# Altium PCB PCB1.PcbDoc
Units mm, origin at the board's own origin, x right, y up, seen from the top; angles counter-clockwise.
Board outline 55.21 x 23.62 mm, 2 copper layers (Top Layer, Bottom Layer); 41 components, 38 nets, 154 pads, 55 vias.
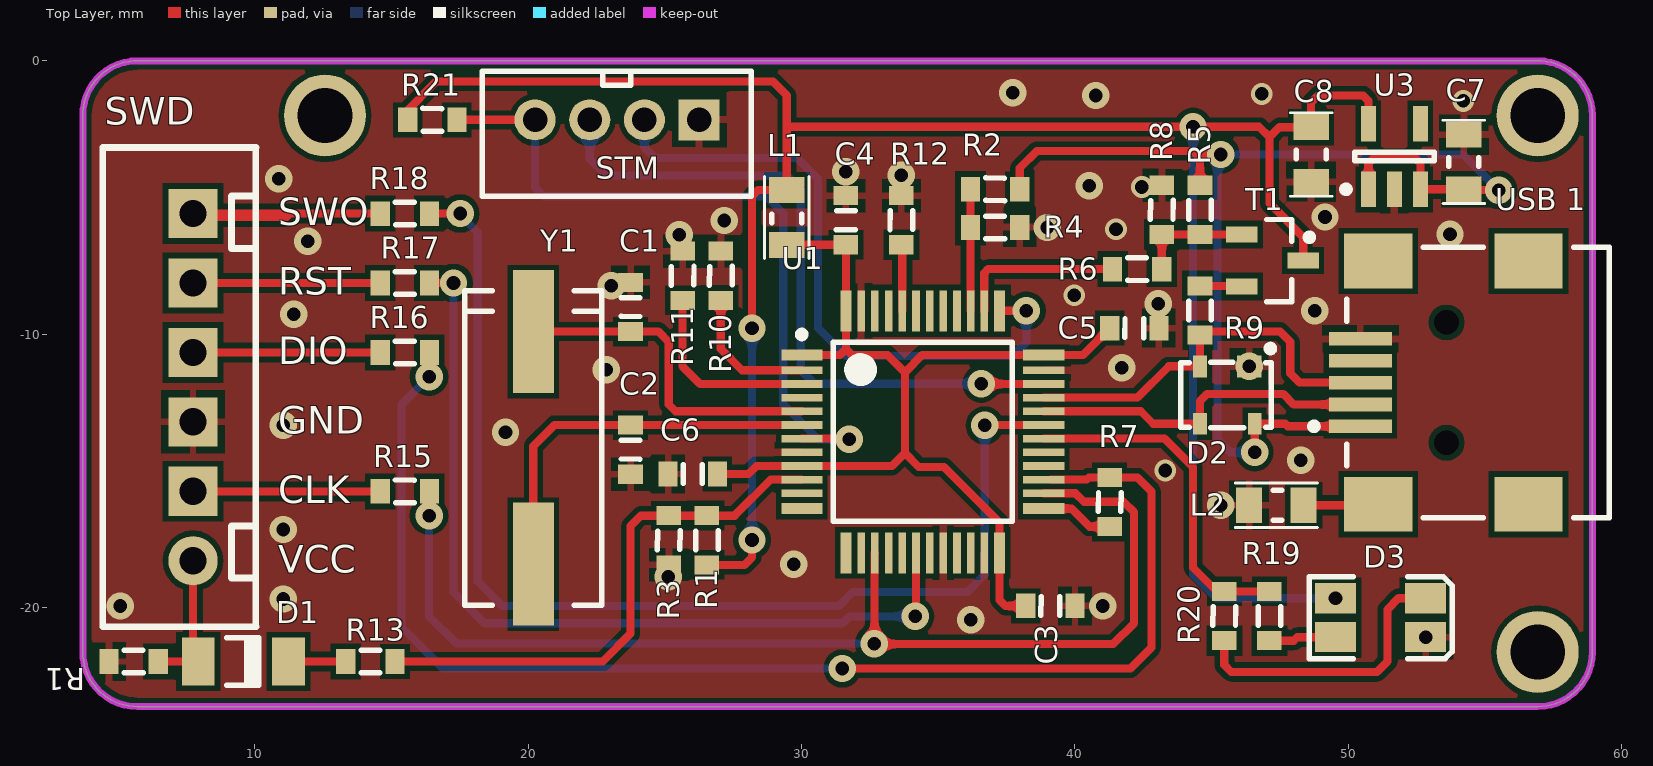
[diagram p0: Top Layer view]
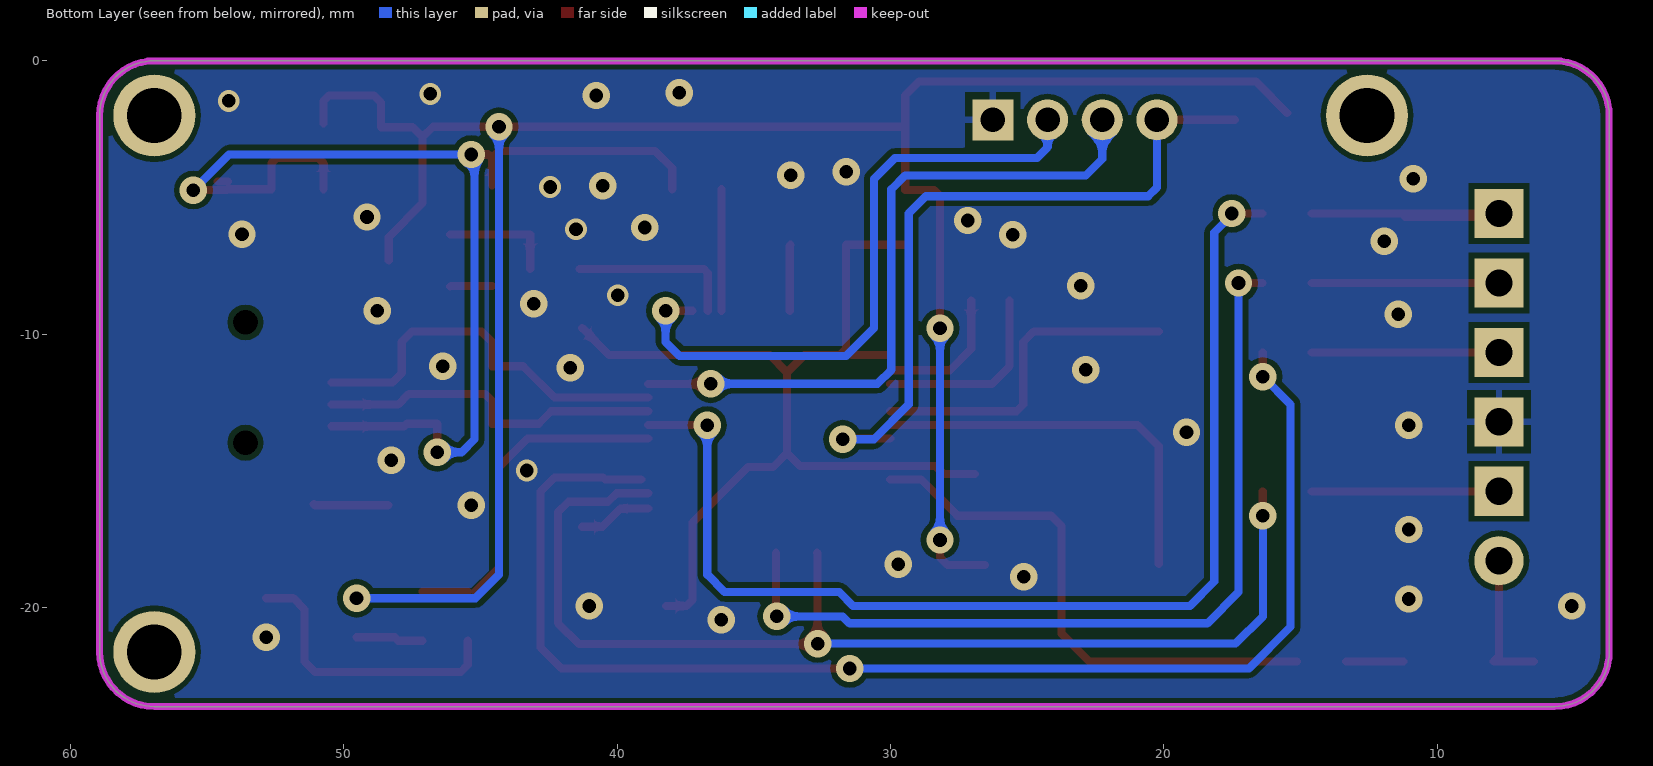
[diagram p1: Bottom Layer view, seen from below]
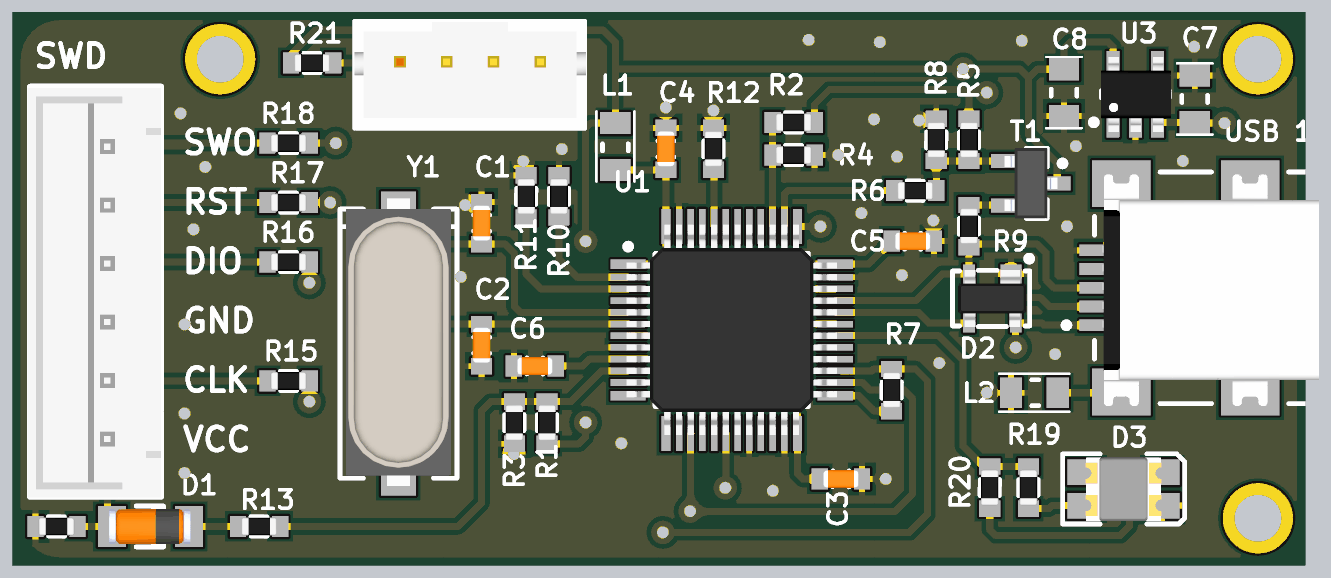
[diagram p2: 3D render of the assembled board from above, using the file's embedded part models]

## Layer stack, top to bottom
Top Solder: solder mask 0.0102, Solder Resist, Dk 3.5
Top Layer: signal copper 0.0356
Dielectric 1: dielectric 0.32, FR-4, Dk 4.8
Bottom Layer: signal copper 0.0356
Bottom Solder: solder mask 0.0102, Solder Resist, Dk 3.5

## Board outline
3.715,-21.622 ccw(c5.715,-21.622) 5.715,-23.622 56.928,-23.622 ccw(c56.928,-21.622) 58.928,-21.622 58.928,-2 ccw(c56.928,-2) 56.928,0 5.715,0 ccw(c5.715,-2) 3.715,-2

## Design rules (kind name [scope] priority, off if disabled: settings)
Clearance [All] p1: gap=0.2 ignorepadtopadclearanceinfootprint=FALSE
PolygonConnect PolygonConnect_1 [ISVIA] p1: connectstyle=Direct reliefconductorwidth=0.254 reliefentries=4 polygonreliefangle="90 Angle" airgapwidth=0.254
PolygonConnect [All] p2: connectstyle=Relief reliefconductorwidth=0.254 reliefentries=4 polygonreliefangle="90 Angle" airgapwidth=0.254
RoutingVias [All] p1: holewidth=0.5 width=1 viastyle="Through Hole" minholewidth=0.5 minwidth=1 maxholewidth=0.5 maxwidth=1
SolderMaskExpansion [All] p1: expansion=0.102 istentingtop=FALSE
Width [All] p1: maxlimit=0.3 minlimit=0.3 preferedwidth=0.3
30 further rules are at their usual default settings.

## Components (designator, comment, footprint, x,y, rotation, side; value= is the part's Value field where it differs from the comment)
C1 "22pF" C603 23.749,-9.006 r270 top
C2 "22pF" C603 23.749,-14.224 r90 top
C3 "100nF" C603 39.105,-19.939 r180 top
C4 "100nF" C603 31.623,-5.831 r270 top
C5 "100nF" C603 42.175,-9.779 r180 top
C6 "100nF" C603 26.024,-15.113 r0 top
C7 "10uF" C805 54.229,-3.699 r270 top
C8 "10uF" C805 48.641,-3.429 r90 top
D1 "LL4148" SOD-80 9.591,-21.971 r0 top
D2 "PRTR5V0U2X" SOT-143B 45.577,-12.226 r180 top
D3 "LED-RG" LED-1210 51.181,-20.369 r0 top
L1 "1K" r805 29.464,-5.731 r90 top
L2 "1K" r805 47.371,-16.256 r180 top
R1 "4.7K" R0603 26.543,-17.537 r270 top
R2 "2.7K" R0603 37.084,-4.699 r180 top
R3 "4.7K" R0603 25.146,-17.537 r90 top
R4 "4.7K" R0603 37.084,-6.096 r180 top
R5 "10K" R0603 44.577,-5.45 r270 top
R6 "100" R0603 42.28,-7.62 r180 top
R7 "100" R0603 41.275,-16.14 r270 top
R8 "36K" R0603 43.18,-5.45 r90 top
R9 "1.5K" R0603 44.577,-9.133 r270 top
R10 "4.7K" R0603 27.051,-7.863 r90 top
R11 "4.7K" R0603 25.654,-7.863 r90 top
R12 "10K" R0603 33.655,-5.831 r270 top
R13 "100" R0603 14.235,-21.971 r0 top
R14 "10K" R0603 5.577,-21.971 r180 top
R15 "22" R0603 15.494,-15.748 r180 top
R16 "22" R0603 15.494,-10.668 r180 top
R17 "22" R0603 15.494,-8.128 r180 top
R18 "22" R0603 15.494,-5.588 r180 top
R19 "100" R0603 47.117,-20.309 r90 top
R20 "100" R0603 45.466,-20.309 r90 top
R21 "10K" R0603 16.499,-2.159 r180 top
STM "PHDR 4" PH-4 24.257,-2.159 r180 top
SWD "CONN-6" XH-6 7.747,-18.288 r90 top
T1 "2n3904" SOT-23-3 47.226,-7.305 r0 top
U1 "STM32F103C8T6" LQFP-48 34.437,-13.569 r0 top
U3 "XC6209" SOT-23-5 51.689,-3.499 r270 top
"USB 1" "USB MINI" USB-MINI-SMD 53.794,-11.77 r0 top
Y1 "8MHz" XTAL-SMD 20.193,-14.156 r270 top

## Footprints (in the part's own frame and the unit in brackets; to place one, negate y for a bottom-side part, rotate by r counter-clockwise, add the part's x,y. Pads: shape width x height; smd on the part's side, far side on the other; paste and mask are expansions set on the pad)
C603 [mm]
  rect 0.7x0.9 smd: 1(-0.9,0) 2(0.9,0)
  silkscreen extent -0.35,-0.34 0.35,0.34, body extent -0.76,-0.38 0.76,0.38, height 0.6
C805 [mm]
  rect 0.95x1.3 smd: 1(-1,0) 2(1,0)
  silkscreen extent -1.52,-0.76 1.52,0.76, body extent -1,-0.62 1,0.63, height 0.78
LED-1210 [mm]
  rect 1.5x1.1 smd: 1(-1.651,0.713) 2(-1.651,-0.713) 3(1.651,-0.713) 4(1.651,0.713)
  silkscreen extent -2.6,-1.5 2.62,1.5, body extent -1.62,-1.36 1.62,1.34, height 1.1
LQFP-48 [mm]
  rect 1.5x0.4 smd: 1(-4.425,2.81) 12(-4.425,-2.81) 25(4.425,-2.81) 36(4.425,2.81)
  rect 1.5x0.28 smd: 2(-4.425,2.25) 3(-4.425,1.75) 4(-4.425,1.25) 5(-4.425,0.75) 6(-4.425,0.25) 7(-4.425,-0.25) 8(-4.425,-0.75) 9(-4.425,-1.25) 10(-4.425,-1.75) 11(-4.425,-2.25) 26(4.425,-2.25) 27(4.425,-1.75) 28(4.425,-1.25) 29(4.425,-0.75) 30(4.425,-0.25) 31(4.425,0.25) 32(4.425,0.75) 33(4.425,1.25) 34(4.425,1.75) 35(4.425,2.25)
  rect 0.4x1.5 smd: 13(-2.81,-4.425) 24(2.81,-4.425) 37(2.81,4.425) 48(-2.81,4.425)
  rect 0.28x1.5 smd: 14(-2.25,-4.425) 15(-1.75,-4.425) 16(-1.25,-4.425) 17(-0.75,-4.425) 18(-0.25,-4.425) 19(0.25,-4.425) 20(0.75,-4.425) 21(1.25,-4.425) 22(1.75,-4.425) 23(2.25,-4.425) 38(2.25,4.425) 39(1.75,4.425) 40(1.25,4.425) 41(0.75,4.425) 42(0.25,4.425) 43(-0.25,4.425) 44(-0.75,4.425) 45(-1.25,4.425) 46(-1.75,4.425) 47(-2.25,4.425)
  silkscreen extent -4.55,-3.27 3.27,3.68, body extent -4.5,-4.5 4.5,4.5, height 1.6
PH-4 [mm]
  rect 1.5x1.5 hole 0.9: 1(-2,0)
  round 1.5 hole 0.9: 2(0,0) 3(2,0) 4(4,0)
  silkscreen extent -3.91,-1.78 5.94,2.79, body extent -3.95,-1.75 5.95,2.75, height 6
R0603 [mm]
  rect 0.7x0.9 smd: 1(-0.9,0) 2(0.9,0)
  silkscreen extent -0.34,-0.42 0.34,0.42, body extent -0.76,-0.38 0.76,0.38, height 0.45
r805 [mm]
  rect 0.95x1.3 smd: 1(1,0) 2(-1,0)
  silkscreen extent -1.5,-0.81 1.5,0.81, body extent -1,-0.61 1,0.64, height 0.78
SOD-80 [mm] "MINI MELF"
  rect 1.2x1.75 smd: 1(-1.65,0) 2(1.65,0)
  silkscreen extent -0.61,-0.87 0.57,0.88, body extent -1.78,-0.75 1.72,0.75, height 1.55
SOT-23-3 [mm] "SOT-23 3PIN"
  rect 1.15x0.6 smd: 1(1.125,0) 2(-1.125,-0.95) 3(-1.125,0.95)
  silkscreen extent -0.2,-1.5 1.48,1.5, body extent -1.13,-1.5 1.13,1.5, height 1.2
SOT-23-5 [mm]
  rect 1.3x0.55 smd: 1(1.2,-0.95) 2(1.2,0) 3(1.2,0.95) 4(-1.2,0.95) 5(-1.2,-0.95)
  silkscreen extent -0.15,-1.9 1.32,1.45, body extent -1.6,-1.48 1.6,1.52, height 0.92
SOT-143B [mm]
  rect 0.9x0.8 smd: 1(-0.8,-1.05)
  rect 0.5x0.8 smd: 2(1,-1.05) 3(1,1.05) 4(-1,1.05)
  silkscreen extent -1.7,-1.82 1.7,1.2, body extent -1.46,-1.21 1.46,1.21, height 1.65
USB-MINI-SMD [mm]
  rect 2.5x2 smd: 0(-2.7,-4.45) 0(-2.7,4.45) 0(2.8,-4.45) 0(2.8,4.45)
  rect 2.3x0.5 smd: 1(-3.35,-1.6) 2(-3.35,-0.8) 3(-3.35,0) 4(-3.35,0.8) 5(-3.35,1.6)
  round 0.6 hole 0.9 unplated: MH1(-0.2,2.2) MH2(-0.2,-2.2)
  silkscreen extent -5.17,-4.95 5.75,4.95, body extent -3.5,-5.05 5.75,4.85, height 3.93
XH-6 [mm]
  round 1.8 hole 1: 1(0,0)
  rect 1.8x1.8 hole 1: 2(2.54,0) 3(5.08,0) 4(7.62,0) 5(10.16,0) 6(12.7,0)
  silkscreen extent -2.41,-2.3 15.11,3.3, body extent -2.45,-2.3 15.05,3.4, height 7
XTAL-SMD [mm]
  rect 4.5x1.5 smd: 1(-4.25,0) 2(4.25,0)
  silkscreen extent -5.75,-2.5 5.75,2.5, body extent -6.21,-2.25 6.09,2.25, height 5.18

## Part data
C1 C2 C3 C4 C5 C6 C7 C8: library part Cap, "Capacitor", Designer="Parsa Malekpour"
D2: "Ultra low capacitance double rail-to-rail ESD protection diode", reverse standoff voltage=5.5V
D3: library part LED-RG-4
L1 L2: library part "Ferrite Bead", "FERRITE BEAD", Code_IEC=1005, Code_JEITA=0402, LatestRevisionDate=29-May-2009, LatestRevisionNote="IPC-7351 Footprint Added.", PackageDescription="Chip Inductor", Published=8-Jun-2000, Publisher="Altium Limited"
R1 R2 R3 R4 R5 R6 R7 R8 R9 R10 R11 R12 R13 R14 R15 R16 R17 R18 R19 R20 R21: library part Resistor, "Resistor", Designer="Parsa Malekpour"
STM: "PinHeader"
U1: "ARM Cortex-M3 32-bit MCU, 64 KB Flash, 20 KB Internal RAM, 37 I/Os, 48-pin LQFP, -40 to 85 degC, Tray", I/Os (High Current)=37, Operating Frequency(F) (Processor speed) (MHz)=72, Supplier Part Number 1=497-6063-ND, Supply Voltage(Vcc) min (V)=2, A/D Converter="2x12-bit (10 Channel)", ComponentLink1Description="Manufacturer URL", ComponentLink1URL=http://www.st.com/web/en/home.html, ComponentLink2Description=Datasheet, ComponentLink2URL=http://www.st.com/st-web-ui/static/active/en/resource/technical/document/datasheet/CD00161566.pdf, ComponentLink3Description="Package Specification", ComponentLink3URL=http://www.st.com/st-web-ui/static/active/en/resource/technical/document/datasheet/DM00058181.pdf, Core="ARM Cortex-M3", DatasheetVersion="Rev. 16", FLASH Size (Prog) (kB)=64, Internal RAM Size (kB)=20, Mounting Technology="Surface Mount", PackageDescription="48-Pin Low Profile Quad Flat Package, 7 x 7 mm Body, 0.5 mm Pitch", PackageReference=LQFP48, PackageVersion="Rev. 6, 06/2013", Packing=Tray, PartNumber=STM32F103C8T6, Supplier 1=Digi-Key, Supplier 2=Farnell, Supplier 3=Newark, Supplier 4=Newark, Supplier 5=Mouser, Supplier Part Number 2=1447637, Supplier Part Number 3=59M2182, Supplier Part Number 4=57P1222, Supplier Part Number 5=511-STM32F103C8T6
U3: "150 mA Low-Noise LDO Regulator"
Y1: library part XTAL, "Crystal Oscillator", Designer="Parsa Malekpour", Email=Malekpour.parsa@Gmail.com
T1: Mark=1A

## Free pads (board coordinates)
  round 3 hole 2: 2(56.928,-2) 3(56.928,-21.622) 4(12.573,-2)

## Via types
v1: diameter 1, hole 0.5, Top Layer to Bottom Layer, tented both sides, 49 vias
v2: diameter 0.8, hole 0.5, Top Layer to Bottom Layer, tented both sides, 6 vias

## Nets (pads, with @x,y where several pads share a name; then routed paths per layer and width w, separated by ;. In a path a pad name is that pad's centre, name@x,y a point inside that pad or via, vN(x,y) a via of type N, cw(c..) or ccw(c..) an arc to the next point about the centre after c; other vN are vias at no path point)
AIN1: R1.1 R3.2 R13.2 U1.10 | length 19.9
  Top Layer w0.3: R13.2 22.733,-21.971 23.749,-20.955 23.749,-17.018 24.13,-16.637 R3.2 R1.1 27.559,-16.637 28.877,-15.319 U1.10
BOOT0: R12.2 U1.44 | length 2.4
  Top Layer w0.3: R12.2 33.687,-6.763 U1.44
GND: "USB 1.5" C1.1 C2.1 C3.1 C4.1 C5.1 C6.1 C7.1 C8.1 D2.1 D3.3 L2.1 R3.1 R4.1 R8.2 R10.2 R11.2 R12.1 R14.2 STM.1 SWD.3 U1.8 U1.20 U1.23 U1.35 U1.47 U3.2
  other v1: 52.832,-21.082 36.195,-20.447 5.08,-19.939 41.021,-19.939 11.049,-19.685 25.127,-18.877 29.718,-18.415 11.049,-17.145 45.339,-16.256 48.26,-14.605 19.177,-13.589 11.049,-13.335 22.86,-11.303 41.713,-11.231 46.377,-11.176 11.43,-9.271 48.768,-9.144 43.053,-8.89 23.045,-8.233 11.938,-6.604 25.527,-6.359 53.721,-6.35 38.989,-6.096 27.178,-5.842 49.149,-5.715 40.521,-4.572 10.882,-4.313 33.655,-4.191 31.623,-4.064 40.767,-1.27 37.726,-1.172
  other v2: 43.307,-14.986 39.979,-8.577 41.503,-6.164 42.45,-4.618 54.203,-1.465 46.837,-1.211
LED: R19.2 R20.2 U1.30 | length 12.5
  Top Layer w0.3: U1.30 43.283,-13.819 44.323,-14.859 44.323,-18.542 R20.2@45.19,-19.409 ; R20.2 R19.2
NetC1_2: C1.2 U1.5 Y1.1 | length 12.4
  Top Layer w0.3: Y1.1 C1.2 24.765,-9.906 25.146,-10.287 25.146,-12.573 25.392,-12.819 U1.5
NetC2_2: C2.2 U1.6 Y1.2 | length 14.5
  Top Layer w0.3: Y1.2 20.193,-14.097 20.971,-13.319 U1.6
NetC3_2: C3.2 C4.2 C5.2 C6.2 L1.2 U1.1 U1.9 U1.24 U1.36 U1.48 | length 36.9
  Top Layer w0.3: C6.2 28.067,-15.113 28.361,-14.819 U1.9 33.314,-14.819 33.782,-14.351 ; L1.2 C4.2 31.627,-6.735 U1.48 31.627,-10.537 ; U1.1 31.405,-10.759 31.627,-10.537 ; C3.2 37.465,-19.939 37.247,-19.721 U1.24 37.247,-16.891 35.215,-14.859 34.29,-14.859 33.782,-14.351 ; C5.2 40.295,-10.759 U1.36 34.417,-10.759 33.782,-11.394 ; 31.627,-10.537 31.849,-10.759 33.147,-10.759 33.782,-11.394 ; 33.782,-14.351 33.782,-11.394
NetD1_1: D1.1 R14.1 SWD.1 | length 5.2
  Top Layer w0.3: R14.1 D1.1 7.747,-21.777 SWD.1
NetD1_2: D1.2 R13.1 | length 2.1
  Top Layer w0.3: D1.2 R13.1
NetD3_2: D3.2 R19.1 | length 2.5
  Top Layer w0.3: R19.1 48.006,-21.209 48.133,-21.082 D3.2
NetD3_4: D3.4 R20.1 | length 10.6
  Top Layer w0.3: R20.1 45.466,-22.098 45.72,-22.352 51.054,-22.352 51.435,-21.971 51.435,-20.066 51.844,-19.657 D3.4
NetL2_2: "USB 1.0" L2.2 | length 2.7
  Top Layer w0.3: L2.2 51.058,-16.256 51.094,-16.22
NetR5_2: R5.2 R6.1 R8.1 T1.3 | length 4.2
  Top Layer w0.3: R6.1 R8.1 43.185,-6.355 44.577,-6.355 T1.3
NetR7_2: R7.2 U1.25 | length 2.7
  Top Layer w0.3: U1.25 39.878,-16.379 40.539,-17.04 R7.2
NetR9_1: R9.1 T1.2 | length 1.5
  Top Layer w0.3: R9.1 46.079,-8.233 T1.2
NetR10_1: R10.1 U1.2 | length 5.1
  Top Layer w0.3: R10.1 27.051,-10.541 27.829,-11.319 U1.2
NetR11_1: R11.1 U1.3 | length 7
  Top Layer w0.3: R11.1 25.654,-11.176 26.297,-11.819 U1.3
NetR15_2: R15.2 SWD.2 | length 6.8
  Top Layer w0.3: SWD.2 R15.2
NetR16_2: R16.2 SWD.4 | length 6.8
  Top Layer w0.3: SWD.4 R16.2
NetR17_2: R17.2 SWD.5 | length 6.8
  Top Layer w0.3: SWD.5 R17.2
NetR18_2: R18.2 SWD.6 | length 10.3
  Top Layer w0.3: 11.176,-5.715 7.874,-5.715 SWD.6 R18.2
NRST: R21.1 STM.4 U1.7 | length 26.5
  Top Layer w0.3: R21.1 STM.4 ; U1.7 31.726,-13.819 v1(31.75,-13.843)
  Bottom Layer w0.3: STM.4 20.257,-4.636 20.574,-4.953 28.702,-4.953 29.337,-5.588 29.337,-12.573 30.607,-13.843 v1(31.75,-13.843)
RXD: U1.13
SWCLK: STM.2 U1.37 | length 23.7
  Top Layer w0.3: U1.37 v1(38.227,-9.144)
  Bottom Layer w0.3: STM.2 24.257,-3.175 24.638,-3.556 29.845,-3.556 30.607,-4.318 30.607,-9.779 31.623,-10.795 37.719,-10.795 38.227,-10.287 v1(38.227,-9.144)
SWDIO: STM.3 U1.34 | length 25.3
  Top Layer w0.3: v1(36.576,-11.811) 36.584,-11.819 U1.34
  Bottom Layer w0.3: STM.3 22.257,-3.588 22.86,-4.191 29.464,-4.191 29.972,-4.699 29.972,-11.303 30.48,-11.811 v1(36.576,-11.811)
T_JTCK: R15.1 U1.15 U1.26 | length 42.3
  Top Layer w0.3: v1(16.383,-16.637) 16.389,-16.631 16.389,-15.753 R15.1 ; v1(32.658,-21.317) 32.677,-21.336 v1@33.147,-21.336 ; U1.15 32.677,-18.004 32.677,-20.886 32.687,-20.876 v1@33.147,-21.336 ; U1.26 40.025,-15.819 40.335,-16.129 41.783,-16.129 42.164,-16.51 42.164,-20.574 41.402,-21.336 v1@33.147,-21.336
  Bottom Layer w0.3: v1(16.383,-16.637) 16.383,-20.32 17.38,-21.317 v1(32.658,-21.317)
T_JTDI: U1.17
T_JTDO: U1.16
T_JTMS: R7.1 R16.1 U1.27 | length 48.5
  Top Layer w0.3: v1(16.383,-11.557) 16.389,-11.551 16.389,-10.673 R16.1 ; v1(31.496,-22.225) 42.037,-22.225 42.799,-21.463 42.799,-15.748 42.291,-15.24 R7.1 40.513,-15.24 40.434,-15.319 U1.27@39.116,-15.319
  Bottom Layer w0.3: v1(16.383,-11.557) 15.367,-12.573 15.367,-20.701 16.891,-22.225 v1(31.496,-22.225)
T_NRST: R17.1 U1.18 | length 32
  Top Layer w0.3: R17.1 v1(17.272,-8.128) ; v1(34.163,-20.32) 34.187,-20.296 U1.18
  Bottom Layer w0.3: v1(17.272,-8.128) 17.272,-19.431 18.415,-20.574 31.496,-20.574 31.75,-20.32 v1(34.163,-20.32)
T_SWO: R18.1 U1.31 | length 41.9
  Top Layer w0.3: R18.1 v1(17.515,-5.588) ; v1(36.703,-13.335) 36.719,-13.319 U1.31
  Bottom Layer w0.3: v1(17.515,-5.588) 17.515,-5.639 18.161,-6.285 18.161,-19.05 19.05,-19.939 31.369,-19.939 31.877,-19.431 36.068,-19.431 36.703,-18.796 v1(36.703,-13.335)
TXD: U1.12
USB-DM: "USB 1.2" D2.3 U1.32 | length 12.9
  Top Layer w0.3: U1.32 42.41,-12.819 42.867,-13.276 D2.3 44.577,-12.446 44.831,-12.192 47.625,-12.192 48.003,-12.57 50.444,-12.57
USB-DP: "USB 1.3" D2.2 R9.2 U1.33 | length 14.5
  Top Layer w0.3: U1.33 42.291,-12.319 43.434,-11.176 D2.2 44.577,-10.287 44.958,-9.906 47.498,-9.906 47.879,-10.287 47.879,-11.43 48.219,-11.77 50.444,-11.77
USB-EN: R6.2 U1.38 | length 6.1
  Top Layer w0.3: U1.38 36.687,-7.763 36.83,-7.62 R6.2
USB-PWR: R2.2 R4.2 U1.39 | length 4.4
  Top Layer w0.3: R2.2 36.187,-4.702 U1.39
VCC: C8.2 D3.1 L1.1 R1.2 R21.2 T1.1 U3.5 | length 84.9
  Top Layer w0.3: R21.2@15.494,-1.905 16.637,-0.762 28.956,-0.762 29.464,-1.27 29.464,-2.413 ; R1.2 27.918,-18.437 28.194,-18.161 v1(28.194,-17.526) ; v1(28.194,-9.779) 28.194,-4.953 28.416,-4.731 L1.1 29.464,-2.413 ; T1.1 48.351,-6.441 47.117,-5.207 47.117,-2.794 ; U3.5 50.739,-1.463 50.546,-1.27 48.895,-1.27 48.641,-1.524 C8.2 47.482,-2.429 47.117,-2.794 ; 29.464,-2.413 v1(44.323,-2.413) 46.736,-2.413 47.117,-2.794
  Bottom Layer w0.3: v1(28.194,-17.526) v1(28.194,-9.779) ; v1(44.323,-2.413) 44.323,-18.796 45.184,-19.657 v1(49.53,-19.657)
VUSB: "USB 1.1" C7.2 D2.4 R2.1 R5.1 U3.1 U3.3 | length 44.4
  Top Layer w0.3: R2.1 37.984,-3.926 38.608,-3.302 44.323,-3.302 44.577,-3.556 ; R5.1 44.577,-3.556 ; v1(45.339,-3.429) 44.704,-3.429 44.577,-3.556 ; v1(46.577,-14.319) D2.4 47.693,-13.276 47.787,-13.37 50.444,-13.37 ; U3.1 50.739,-3.744 50.927,-3.556 52.451,-3.556 52.639,-3.744 U3.3 C7.2 54.261,-4.731 v1(55.499,-4.731) ; C7.2@54.229,-4.413 C7.2@54.61,-4.413
  Bottom Layer w0.3: v1(46.577,-14.319) 45.688,-14.319 45.212,-13.843 45.212,-3.556 v1(45.339,-3.429) 54.197,-3.429 v1(55.499,-4.731)
pads on no net: "USB 1.4" "USB 1.MH1" "USB 1.MH2" U1.4 U1.11 U1.14 U1.19 U1.21 U1.22 U1.28 U1.29 U1.40 U1.41 U1.42 U1.43 U1.45 U1.46 U3.4

## Polygon pours and split planes (outlines as drawn)
GND on Top Layer "Bottom Layer-No Net" (solid, remove dead copper, pour order 0): 58.928,0 58.928,-23.622 0,-23.622 0,0
GND on Bottom Layer "Bottom Layer-No Net" (solid, remove dead copper, pour order 2): 58.801,-0.127 58.801,-23.749 -0.127,-23.749 -0.127,-0.127

## Keep-outs
Keep-Out Layer:
  the board outline again, w0.254

## Silkscreen, mask and mechanical layers (free items; w line width, h text height)
Top Overlay:
  text "SWO" at 10.868,-6.023 h1
  text "RST" at 10.868,-8.563 h1
  text "DIO" at 10.868,-11.103 h1
  text "GND" at 10.868,-13.643 h1
  text "CLK" at 10.868,-16.183 h1
  text "VCC" at 10.868,-18.723 h1

## Text inside footprints (layer, text, board x,y; h text height)
"USB 1": Mechanical 1 "PCB Edge" at 59.276,-15.806 h0.25 r90